# Altium PCB HandTiePCB_new3.PcbDoc
Units mil, origin at the board's own origin, x right, y up, seen from the top; angles counter-clockwise.
Board outline 6000 x 4000 mil, 2 copper layers (Top Layer, Bottom Layer); 49 components, 53 nets, 217 pads, 1 vias.
Unrouted connection lines stored in the file: 6.
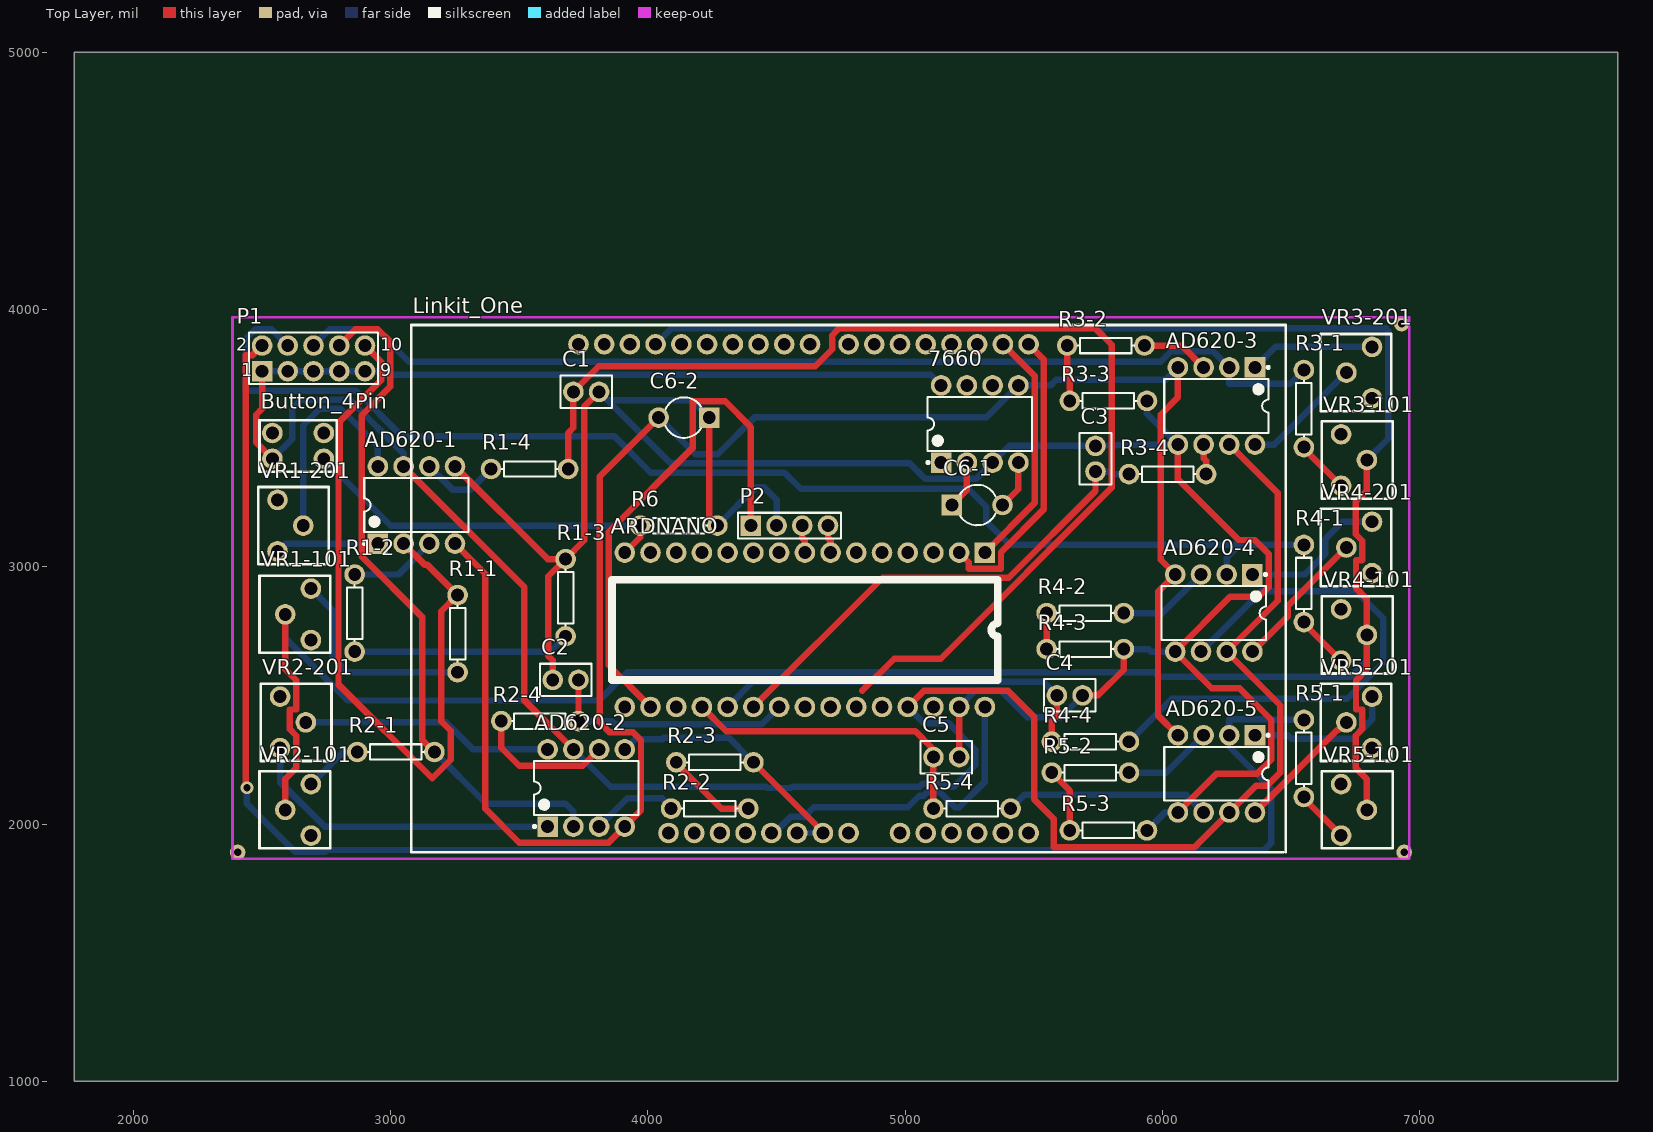
[diagram p0: Top Layer view]
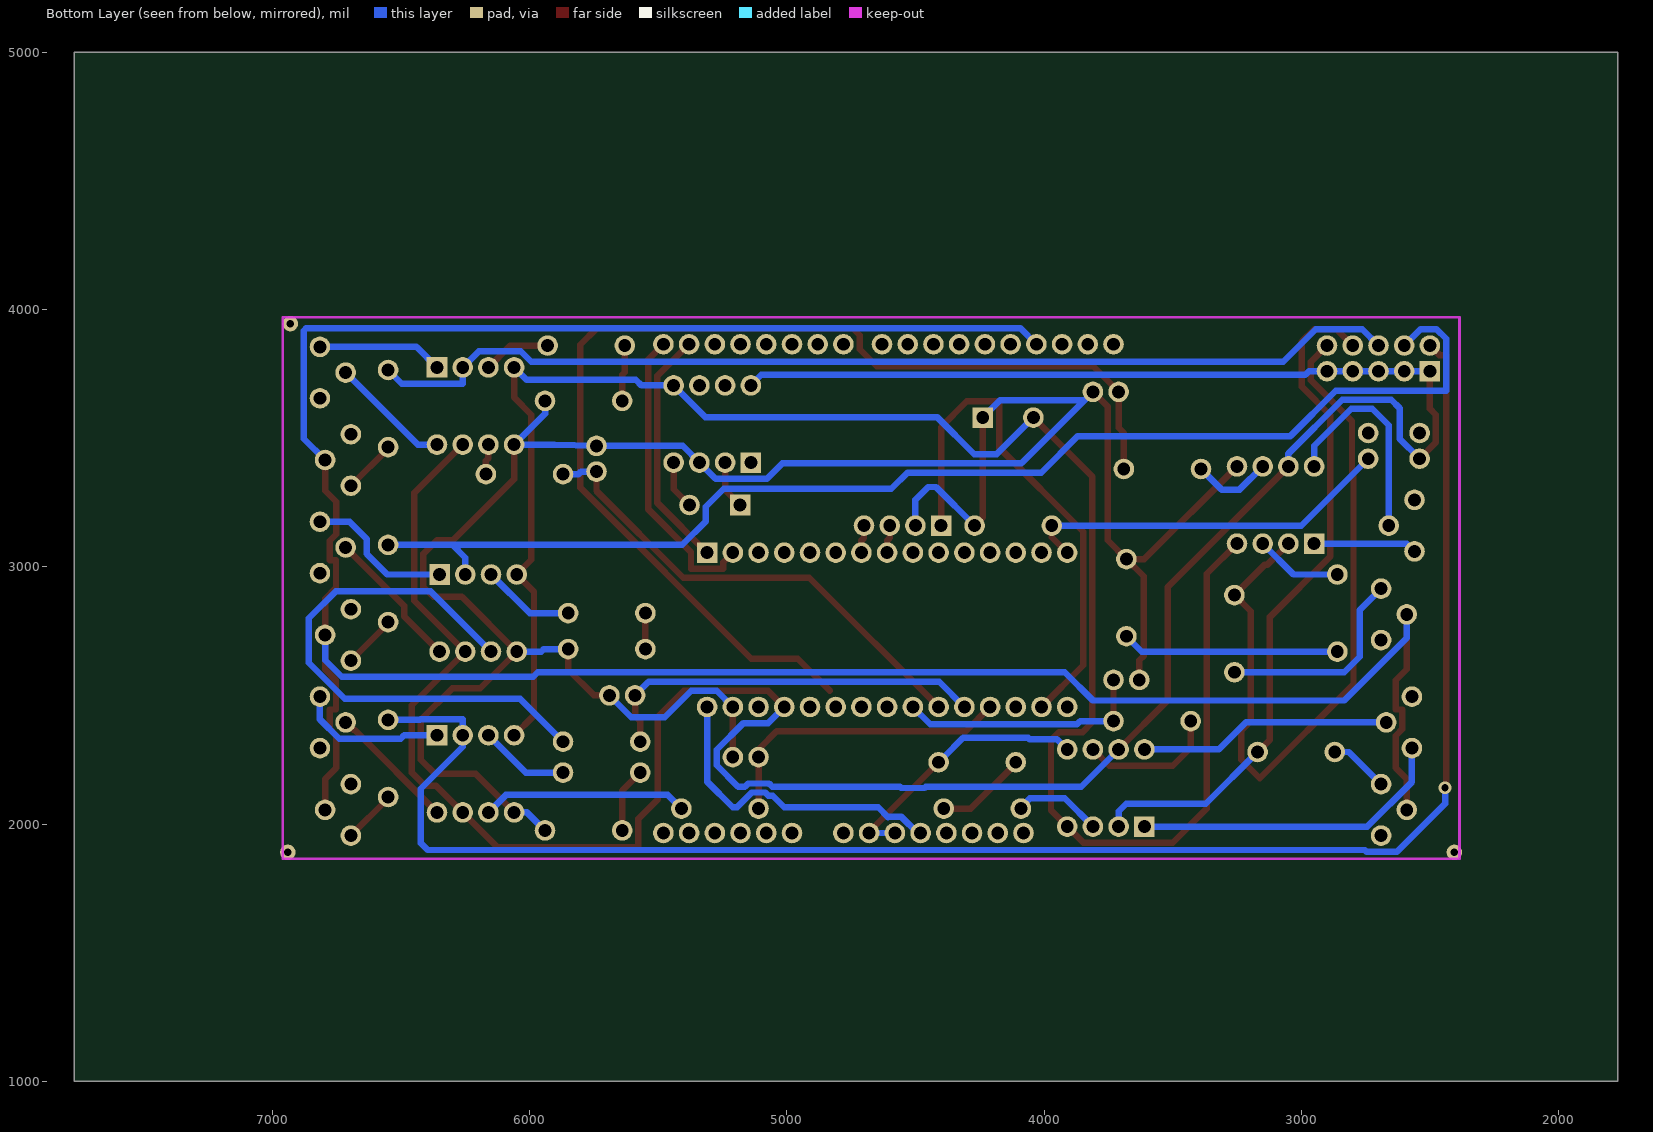
[diagram p1: Bottom Layer view, seen from below]

## Layer stack, top to bottom
Top Layer: signal copper 1.4
Dielectric: dielectric 12.6, FR-4, Dk 4.8
Bottom Layer: signal copper 1.4

## Board outline
1770,1000 7770,1000 7770,5000 1770,5000

## Design rules (kind name [scope] priority, off if disabled: settings)
Clearance [All] p1: gap=10
PolygonConnect [All] p1: connectstyle=Relief reliefconductorwidth=10 reliefentries=4 polygonreliefangle="90 Angle"
RoutingVias [All] p1: holewidth=28 width=50 viastyle="Through Hole" minholewidth=28 minwidth=50 maxholewidth=28 maxwidth=50
SilkscreenOverComponentPads [All] p1: minsilkscreentomaskgap=10
SolderMaskExpansion [All] p1: expansion=4
Width [All] p1: maxlimit=25 minlimit=25 preferedwidth=25
27 further rules are at their usual default settings.

## Components (designator, comment, footprint, x,y, rotation, side; value= is the part's Value field where it differs from the comment)
7660 "SW-DIP4" DIP-8 5290,3555 r90 top
AD620-1 "SW-DIP4" DIP-8 3100,3240 r90 top
AD620-2 "SW-DIP4" DIP-8 3760,2140 r90 top
AD620-3 "SW-DIP4" DIP-8 6210,3625 r270 top
AD620-4 "SW-DIP4" DIP-8 6200,2820 r270 top
AD620-5 "SW-DIP4" DIP-8 6210,2195 r270 top
ARDNANO "Arduino Nano" ARDNANO_DIP30 5310,3055 r270 top
Button_4Pin "Button_4Pin" Button_4Pin 2740,3420 r180 top
C1 "Cap" CAPR2.54-5.1x3.2 3760,3680 r0 top
C2 "Cap" CAPR2.54-5.1x3.2 3680,2560 r180 top
C3 "Cap" CAPR2.54-5.1x3.2 5740,3420 r90 top
C4 "Cap" CAPR2.54-5.1x3.2 5640,2500 r0 top
C5 "Cap" CAPR2.54-5.1x3.2 5160,2260 r0 top
C6-1 "Cap2" CAPR5-4X5 5280,3240 r0 top
C6-2 "Cap2" CAPR5-4X5 4140,3580 r180 top
Linkit_One "Linkit_One" Linkit_One 4080,1965 r90 top locked
P1 "Header 5X2" HDR2X5 2500,3760 r0 top
P2 "Header 4" HDR1X4 4400,3160 r0 top
R1-1 "Res1" AXIAL-0.3 3260,2740 r90 top
R1-2 "Res1" AXIAL-0.3 2860,2820 r90 top
R1-3 "Res1" AXIAL-0.3 3680,2880 r270 top
R1-4 "Res1" AXIAL-0.3 3540,3380 r180 top
R2-1 "Res1" AXIAL-0.3 3020,2280 r0 top
R2-2 "Res1" AXIAL-0.3 4240,2060 r180 top
R2-3 "Res1" AXIAL-0.3 4260,2240 r180 top
R2-4 "Res1" AXIAL-0.3 3580,2400 r180 top
R3-1 "Res1" AXIAL-0.3 6550,3615 r90 top
R3-2 "Res1" AXIAL-0.3 5780,3860 r0 top
R3-3 "Res1" AXIAL-0.3 5790,3645 r180 top
R3-4 "Res1" AXIAL-0.3 6020,3360 r0 top
R4-1 "Res1" AXIAL-0.3 6550,2935 r90 top
R4-2 "Res1" AXIAL-0.3 5700,2820 r0 top
R4-3 "Res1" AXIAL-0.3 5700,2680 r180 top
R4-4 "Res1" AXIAL-0.3 5720,2320 r0 top
R5-1 "Res1" AXIAL-0.3 6550,2255 r90 top
R5-2 "Res1" AXIAL-0.3 5720,2200 r0 top
R5-3 "Res1" AXIAL-0.3 5790,1975 r180 top
R5-4 "Res1" AXIAL-0.3 5260,2060 r0 top
R6 "Res1" AXIAL-0.3 4120,3160 r0 top
VR1-101 "VR" VarResistor 2690,2715 r90 top
VR1-201 "VR" VarResistor 2560,3260 r270 top
VR2-101 "VR" VarResistor 2690,1955 r90 top
VR2-201 "VR" VarResistor 2570,2495 r270 top
VR3-101 "VR" VarResistor 6695,3515 r270 top
VR3-201 "VR" VarResistor 6815,3655 r90 top
VR4-101 "VR" VarResistor 6695,2835 r270 top
VR4-201 "VR" VarResistor 6815,2975 r90 top
VR5-101 "VR" VarResistor 6695,2155 r270 top
VR5-201 "VR" VarResistor 6815,2295 r90 top

## Footprints (in the part's own frame and the unit in brackets; to place one, negate y for a bottom-side part, rotate by r counter-clockwise, add the part's x,y. Pads: shape width x height; smd on the part's side, far side on the other; paste and mask are expansions set on the pad)
ARDNANO_DIP30 [mil]
  rect 80x80 hole 50 mask+4: 1(0,0)
  round 80 hole 50 mask+4: 2(0,-100) 3(0,-200) 4(0,-300) 5(0,-400) 6(0,-500) 7(0,-600) 8(0,-700) 9(0,-800) 10(0,-900) 11(0,-1000) 12(0,-1100) 13(0,-1200) 14(0,-1300) 15(0,-1400) 16(600,-1400) 17(600,-1300) 18(600,-1200) 19(600,-1100) 20(600,-1000) 21(600,-900) 22(600,-800) 23(600,-700) 24(600,-600) 25(600,-500) 26(600,-400) 27(600,-300) 28(600,-200) 29(600,-100) 30(600,0)
  silkscreen extent 105,-1450 495,50
AXIAL-0.3 [mil] "Axial Device, Thru-Hole; 2 Leads; 0.3 in Pin Spacing"
  round 80 hole 50 mask+4: 1(-150,0) 2(150,0)
  silkscreen extent -109,-30 109,30
Button_4Pin [mil]
  round 80 hole 50 mask+4: 1(0,0) 2(0,-100) 3(200,-100) 4(200,0)
  silkscreen extent -50,-150 250,50
CAPR2.54-5.1x3.2 [mil] "Capacitor, Ceramic, Thru-Hole, Dipped Radial; Body 5.1 x 3.2 mm (WxT) Pin Spacing 2.54 mm (typ)"
  round 80 hole 50 mask+4: 1(-50,0) 2(50,0)
  silkscreen extent -100,-63 100,63
CAPR5-4X5 [mil] "Capacitor; 2 Leads"
  rect 80x80 hole 50 mask+4: 1(-98.43,0)
  round 80 hole 50 mask+4: 2(98.43,0)
  silkscreen extent -66,-79 72,79
DIP-8 [mil] "DIP; 8 Leads; Row Spacing 7.62 mm; Pitch 2.54 mm"
  rect 80x80 hole 50 mask+4: 1(-150,150)
  round 80 hole 50 mask+4: 2(-150,50) 3(-150,-50) 4(-150,-150) 5(150,-150) 6(150,-50) 7(150,50) 8(150,150)
  silkscreen extent -155,-203 104,206, body extent -142,-203 142,203, height 200
HDR1X4 [mil] "Connector; Header; 4 Position"
  rect 80x80 hole 50: 1(0,0)
  round 80 hole 50: 2(100,0) 3(200,0) 4(300,0)
  silkscreen extent -50,-50 350,50
HDR2X5 [mil] "Connector; Header; 5x2 Position"
  rect 80x80 hole 50: 1(0,0)
  round 80 hole 50: 2(0,100) 3(100,0) 4(100,100) 5(200,0) 6(200,100) 7(300,0) 8(300,100) 9(400,0) 10(400,100)
  silkscreen extent -50,-50 450,150
Linkit_One [mil]
  round 80 hole 50 mask+4: 1(0,0) 2(0,-100) 3(0,-200) 4(0,-300) 5(0,-400) 6(0,-500) 7(0,-600) 8(0,-700) 9(0,-900) 10(0,-1000) 11(0,-1100) 12(0,-1200) 13(0,-1300) 14(0,-1400) 15(1900,-1400) 16(1900,-1300) 17(1900,-1200) 18(1900,-1100) 19(1900,-1000) 20(1900,-900) 21(1900,-800) 22(1900,-700) 23(1900,-550) 24(1900,-450) 25(1900,-350) 26(1900,-250) 27(1900,-150) 28(1900,-50) 29(1900,50) 30(1900,150) 31(1900,250) 32(1900,350)
  silkscreen extent -75,-2400 1975,1000
VarResistor [mil]
  round 80 hole 50 mask+4: 1(0,0) 2(100,100) 3(200,0)
  silkscreen extent -50,-75 250,200

## Part data
7660 AD620-1 AD620-2 AD620-3 AD620-4 AD620-5: "DIP Switch"
C1 C2 C3 C4 C5 C6-1 C6-2: "Capacitor"
P1: "Header, 5-Pin, Dual row"
P2: "Header, 4-Pin"
R1-1 R1-2 R1-3 R1-4 R2-1 R2-2 R2-3 R2-4 R3-1 R3-2 R3-3 R3-4 R4-1 R4-2 R4-3 R4-4 R5-1 R5-2 R5-3 R5-4 R6: "Resistor"
VR1-101 VR1-201 VR2-101 VR2-201 VR3-101 VR3-201 VR4-101 VR4-201 VR5-101 VR5-201: library part VarR

## Free pads (board coordinates)
  round 60 hole 30: 0(2405,1890) 1(6940,1890) 2(6930,3945)

## Via types
v1: diameter 50, hole 28, Top Layer to Bottom Layer, 1 vias

## Nets (pads, with @x,y where several pads share a name; then routed paths per layer and width w, separated by ;. In a path a pad name is that pad's centre, name@x,y a point inside that pad or via, vN(x,y) a via of type N, cw(c..) or ccw(c..) an arc to the next point about the centre after c; other vN are vias at no path point)
GND: 7660.3 AD620-1.5 AD620-2.5 AD620-3.5 AD620-4.5 AD620-5.5 ARDNANO.29 C1.2 C2.2 C3.2 C4.2 C5.2 C6-2.1 Linkit_One.6 Linkit_One.7 P2.2 R1-3.1 R2-3.1 R3-3.1 R4-3.1 R5-3.1 R6.2 | length 10466.8
  Top Layer w25: AD620-1.5 3610,3030 R1-3.1 ; C2.2 3630,2636 3613,2653 3613,2963 R1-3.1 ; C1.2 3753,3623 3753,3103 R1-3.1 ; C6-2.1 4238.43,3191.57 R6.2 ; R2-3.1@4390,2260 4680,1970 Linkit_One.7 ; C5.2 ARDNANO.29 ; C4.2 5750,2500 5850,2600 R4-3.1 ; AD620-5.5 6210,2195 6368,2195 6423,2250 6423,2405 6300,2528 6192,2528 AD620-4.5 6263,2883 6375,2883 6413,2921 6413,3050 6359,3104 6297,3104 6060,3341 AD620-3.5
  Bottom Layer w25: C1.2 3843,3647 ; AD620-2.5 3950,2330 4056.61,2330 4061.61,2335 4315,2335 R2-3.1@4390,2260 ; C6-2.1 4171.43,3647 3843,3647 ; R6.2 4420,3310 4450,3310 4500,3260 P2.2 ; Linkit_One.6 Linkit_One.7 ; ARDNANO.29 5272.5,2517.5 5372,2517.5 5474.5,2415 5605,2415 C4.2 ; R4-3.1 5945,2680 5955,2670 AD620-4.5 ; R5-3.1 6010,2045 AD620-5.5 ; R3-3.1 5940,3595 AD620-3.5 5905,3475 C3.2 5405,3470 7660.3 5277,3342 5077,3342 5017,3402 4088,3402 3843,3647
GND2: Linkit_One.29 VR1-101.2 VR2-101.2 VR3-101.2 VR4-101.2 VR5-101.2 | length 10324.1
  Top Layer w25: VR2-101.2 2590,2175 2633,2218 2633,2343.61 2607.5,2369.11 2607.5,2445 2632.5,2445 2632.5,2558.5 2590,2601 VR1-101.2 ; VR5-101.2 6795,2175 6752,2218 6752,2343.61 6777.5,2369.11 6777.5,2445 6752.5,2445 6752.5,2558 6795,2600.5 VR4-101.2 6795,2875 6752.5,2917.5 6752.5,3025 6777.5,3025 6777.5,3100.89 6752,3126.39 6752,3253 6795,3296 VR3-101.2
  Bottom Layer w25: VR1-101.2 2590,2723 2833,2480 3810,2480 3920,2590 5968,2590 5986,2572 6730,2572 6795,2637 VR4-101.2 ; Linkit_One.29 4093,3928 6868,3928 6878,3918 6878,3498 VR3-101.2
Net7660_2: 7660.2 C6-1.1 | length 189.2
  Top Layer w25: C6-1.1 5240,3298.43 7660.2
Net7660_4: 7660.4 C6-1.2 | length 190.5
  Top Layer w25: C6-1.2 5440,3301.57 7660.4
Net7660_5: 7660.5 AD620-1.4 AD620-2.4 AD620-3.4 AD620-4.4 AD620-5.4 C6-2.2 | length 7291.8
  Top Layer w25: AD620-1.4 3367,2973 3367,2060 3500,1927 3847,1927 AD620-2.4 3973,2053 3973,2325 3940.5,2357.5 3850,2357.5 3812.5,2395 3812.5,3350.93 C6-2.2 ; AD620-5.4 5983,2422 5983,2903 AD620-4.4 5993,3027 5993,3591 6060,3658 AD620-3.4
  Bottom Layer w25: C6-2.2 4184.57,3437 4271,3437 4416,3582 5317,3582 7660.5 5565,3705 5587,3727 6012,3727 AD620-3.4
NetAD620-1_1: AD620-1.1 VR1-201.3 | length 402.4
  Bottom Layer w25: VR1-201.3 2590,3090 AD620-1.1
NetAD620-1_2: AD620-1.2 P1.10 R1-1.2 | length 3002.9
  Top Layer w25: P1.10 2962.5,3797.5 2962.5,3725 2803,3565.5 2803,3358 2797,3352 2797,2542 3161,2178 3233,2250 3233,2363 3197,2399 3197,2827 R1-1.2 3143,3007 3133,3007 AD620-1.2
NetAD620-1_3: AD620-1.3 R1-2.2 | length 339.7
  Bottom Layer w25: R1-2.2 3030,2970 AD620-1.3
NetAD620-1_6: AD620-1.6 R1-4.2 | length 310.4
  Bottom Layer w25: AD620-1.6 3240,3300 3310,3300 R1-4.2
NetAD620-1_8: AD620-1.8 VR1-201.2 | length 845.9
  Bottom Layer w25: VR1-201.2 2660,3550 2723.72,3613.72 2806.28,3613.72 2950,3470 AD620-1.8
NetAD620-2_1: AD620-2.1 VR2-201.3 | length 1243.4
  Bottom Layer w25: VR2-201.3 2570,2163.39 2743.39,1990 AD620-2.1
NetAD620-2_2: AD620-2.2 P1.8 R2-1.2 | length 2697
  Top Layer w25: P1.8 2863,3923 2950,3923 2997.5,3875.5 2997.5,3700 2887,3589.5 2887,3040 3122,2805 3122,2328 R2-1.2
  Bottom Layer w25: R2-1.2 3371,2079 3681,2079 3710,2050 AD620-2.2
NetAD620-2_3: AD620-2.3 R2-2.2 | length 350.9
  Bottom Layer w25: AD620-2.3 3920,2100 4055,2100 4080,2075 R2-2.2@4080,2050
NetAD620-2_6: AD620-2.6 R2-4.2 | length 538.1
  Top Layer w25: R2-4.2 3430,2297 3500,2227 3747,2227 AD620-2.6
NetAD620-2_8: AD620-2.8 VR2-201.2 | length 983.5
  Bottom Layer w25: VR2-201.2 3215,2395 3320,2290 AD620-2.8
NetAD620-3_1: AD620-3.1 VR3-201.3 | length 488.1
  Bottom Layer w25: AD620-3.1 6440,3855 VR3-201.3
NetAD620-3_2: AD620-3.2 P1.6 R3-1.2 | length 4056.3
  Bottom Layer w25: P1.6 2763,3923 2944,3923 3070,3797 5993,3797 6034,3838 6197,3838 AD620-3.2 6260,3712 6497,3712 R3-1.2
NetAD620-3_3: AD620-3.3 R3-2.2 | length 265.2
  Top Layer w25: R3-2.2 6075,3860 AD620-3.3
NetAD620-3_6: AD620-3.6 R3-4.2 | length 119.1
  Top Layer w25: AD620-3.6 6160,3422 6170,3412 R3-4.2
NetAD620-3_8: AD620-3.8 VR3-201.2 | length 471
  Bottom Layer w25: AD620-3.8 6435,3475 VR3-201.2
NetAD620-4_1: AD620-4.1 VR4-201.3 | length 583.9
  Bottom Layer w25: AD620-4.1 6553,2970 6633,3050 6633,3108 6700,3175 VR4-201.3
NetAD620-4_2: AD620-4.2 P1.4 R4-1.2 | length 5187.1
  Bottom Layer w25: P1.4 2536,3924 2475,3924 2437,3886 2437,3684.64 2865.69,3684.64 3042.33,3508 3868.94,3508 4010.94,3366 4531,3366 4594,3303 5245,3303 5315,3233 5315,3176 5406,3085 6300,3085 ; AD620-4.2 6250,3035 6300,3085 ; 6300,3085 R4-1.2 6300,3085
NetAD620-4_3: AD620-4.3 R4-2.2 | length 362.1
  Bottom Layer w25: R4-2.2 6000,2820 AD620-4.3
NetAD620-4_6: AD620-4.6 R4-4.2 | length 2137.4
  Bottom Layer w25: R4-4.2 6037,2487 6718.61,2487 6858,2626.39 6858,2800 6753,2905 6385,2905 AD620-4.6
NetAD620-4_8: AD620-4.8 VR4-201.2 | length 556.2
  Top Layer w25: AD620-4.8 6488,2808 6488,2848 VR4-201.2
NetAD620-5_1: AD620-5.1 VR5-201.3 | length 579.7
  Bottom Layer w25: AD620-5.1 6488,2345 6501,2332 6740.39,2332 6815,2406.61 VR5-201.3
NetAD620-5_2: AD620-5.2 P1.2 R5-1.2 | length 6737.6
  Top Layer w25: v1(2441,2141) 2437,2145 2437,3823 2463,3823 P1.2
  Bottom Layer w25: v1(2441,2141) 2441,2079.5 2628,1892.5 2746.5,1892.5 2753,1899 6396,1899 6423,1926 6423,2137 6260,2300 AD620-5.2 6260,2408 6423,2408 6426,2405 R5-1.2
NetAD620-5_3: AD620-5.3 R5-2.2 | length 350.1
  Bottom Layer w25: R5-2.2 6015,2200 AD620-5.3
NetAD620-5_6: AD620-5.6 R5-4.2 | length 800.1
  Bottom Layer w25: R5-4.2 5463,2113 6092,2113 AD620-5.6
NetAD620-5_8: AD620-5.8 VR5-201.2 | length 500
  Top Layer w25: AD620-5.8 6681,2366 6686,2366 VR5-201.2
NetARDNANO_1: ARDNANO.1 Linkit_One.16 | length 940.9
  Top Layer w25: ARDNANO.1 5503,3248 5503,3742 Linkit_One.16
NetARDNANO_2: ARDNANO.2 Linkit_One.15 | length 1168.4
  Top Layer w25: ARDNANO.2 5247,3018 5247,2992.5 5372.5,2992.5 5372.5,3057 5538,3222.5 5538,3807 Linkit_One.15
NetARDNANO_15: ARDNANO.15 Button_4Pin.1 R6.1 | length 1467.5
  Top Layer w25: ARDNANO.15 3970,3115 R6.1
  Bottom Layer w25: Button_4Pin.1 3000,3160 R6.1
NetARDNANO_17: ARDNANO.17 P2.1 | length 2040.4
  Top Layer w25: ARDNANO.17 3847.5,2617.5 3847.5,3136 4175,3463.5 4175,3643 4300,3643 4400,3543 P2.1
NetARDNANO_19: ARDNANO.19 C5.1 R5-4.1 | length 1208.3
  Top Layer w25: ARDNANO.19 4305,2360 4415,2360 4703.75,2360 5040,2360 5105,2295 5105,2255 C5.1 R5-4.1
NetARDNANO_20: ARDNANO.20 C4.1 R4-4.1 | length 1530.4
  Top Layer w25: R4-4.1 5570,2400 5590,2420 C4.1
  Bottom Layer w25: ARDNANO.20 4407.5,2552.5 5537.5,2552.5 C4.1
NetARDNANO_21: ARDNANO.21 C3.1 R3-4.1 | length 1887.1
  Top Layer w25: ARDNANO.21 4912.5,2957.5 5402.61,2957.5 5740,3294.89 C3.1
  Bottom Layer w25: C3.1 5800,3370 5810,3360 R3-4.1
NetARDNANO_22: ARDNANO.22 C2.1 R2-4.1 | length 972.7
  Top Layer w25: R2-4.1 C2.1
  Bottom Layer w25: R2-4.1 3860,2400 3872,2388 4443,2388 ARDNANO.22
NetARDNANO_23: ARDNANO.23 P2.4 | length 4427.7
  Top Layer w25: 3690,3380 3690,3520 3710,3540 3710,3680 3809,3779 4650,3779 4716,3845 4716,3900 4744,3928 5738,3928 5803,3863 5803,3308 5138,2643 4958,2643 4832.5,2517.5 ; ARDNANO.23 ARDNANO.23@4621.61,2455
NetARDNANO_24: ARDNANO.24 P2.3
NetARDNANO_25: ARDNANO.25 C1.1 R1-4.1
NetARDNANO_30: ARDNANO.30 Linkit_One.5 | length 1251.1
  Bottom Layer w25: Linkit_One.5 4491.61,1965 4554.11,2027.5 4605.89,2027.5 4606.69,2026.69 4645,2065 5010,2065 5055,2110 5071.61,2110 5084.11,2122.5 5135.89,2122.5 5193.39,2065 5210,2065 5310,2165 ARDNANO.30
NetR1-1_1: R1-1.1 VR1-101.3 | length 811.2
  Bottom Layer w25: VR1-101.3 2773,2832 2773,2650 2833,2590 R1-1.1
NetR1-2_1: R1-2.1 R1-3.2 | length 844.9
  Bottom Layer w25: R1-2.1 3620,2670 R1-3.2
NetR2-1_1: R2-1.1 VR2-101.3 | length 231.8
  Bottom Layer w25: VR2-101.3 2815,2280 R2-1.1
NetR2-2_1: R2-2.1 R2-3.2 | length 380.8
  Top Layer w25: R2-3.2@4090,2255 4285,2060 R2-2.1
NetR3-1_1: R3-1.1 VR3-101.3 | length 210.1
  Top Layer w25: R3-1.1 6550,3460 VR3-101.3
NetR3-2_1: R3-2.1 R3-3.2 | length 219.1
  Top Layer w25: R3-2.1 5630,3757 5640,3747 R3-3.2
NetR4-1_1: R4-1.1 VR4-101.3 | length 210.1
  Top Layer w25: R4-1.1 6550,2780 VR4-101.3
NetR4-2_1: R4-2.1 R4-3.2 | length 140
  Top Layer w25: R4-3.2 R4-2.1
NetR5-1_1: R5-1.1 VR5-101.3 | length 210.1
  Top Layer w25: R5-1.1 6550,2100 VR5-101.3
NetR5-2_1: R5-2.1 R5-3.2 | length 254
  Top Layer w25: R5-2.1 5640,2130 R5-3.2
VCC: 7660.8 AD620-1.7 AD620-2.7 AD620-3.7 AD620-4.7 AD620-5.7 ARDNANO.27 Button_4Pin.4 P1.1 P1.3 P1.5 P1.7 P1.9 | length 10907.3
  Top Layer w25: P1.1 2500,3614 2477,3591 2477,3483 Button_4Pin.4 ; AD620-1.7 3520,2920 3520,2480 AD620-2.7 ; ARDNANO.27 5073,2518 5400,2518 5501,2417 5501,2096 5577,2020 5577,1909 6124,1909 AD620-5.7 6364,2149 6407,2149 6458,2200 6458,2462 AD620-4.7 6448,2868 6448,3287 AD620-3.7
  Bottom Layer w25: P1.1 P1.3 P1.5 P1.7 P1.9 2970,3760 2984,3746 5099,3746 7660.8 ; Button_4Pin.4 2618,3498 2618,3617 2650,3649 2841,3649 3050,3440 AD620-1.7 ; AD620-2.7 3855,2145 4460,2145 4465,2140 4555,2140 4560,2145 5057.11,2145 5069.61,2157.5 5150.39,2157.5 5162.89,2145 5189.5,2145 5272.5,2228 5272.5,2288.5 5168.5,2392.5 5072.5,2392.5 ARDNANO.27
pads on no net: 7660.1 7660.6 7660.7 ARDNANO.3 ARDNANO.4 ARDNANO.5 ARDNANO.6 ARDNANO.7 ARDNANO.8 ARDNANO.9 ARDNANO.10 ARDNANO.11 ARDNANO.12 ARDNANO.13 ARDNANO.14 ARDNANO.16 ARDNANO.18 ARDNANO.26 ARDNANO.28 Button_4Pin.2 Button_4Pin.3 Linkit_One.1 Linkit_One.2 Linkit_One.3 Linkit_One.4 Linkit_One.8 Linkit_One.9 Linkit_One.10 Linkit_One.11 Linkit_One.12 Linkit_One.13 Linkit_One.14 Linkit_One.17 Linkit_One.18 Linkit_One.19 Linkit_One.20 Linkit_One.21 Linkit_One.22 Linkit_One.23 Linkit_One.24 Linkit_One.25 Linkit_One.26 Linkit_One.27 Linkit_One.28 Linkit_One.30 Linkit_One.31 Linkit_One.32 VR1-101.1 VR1-201.1 VR2-101.1 VR2-201.1 VR3-101.1 VR3-201.1 VR4-101.1 VR4-201.1 VR5-101.1 VR5-201.1
copper on no net: | length 218.3
  Top Layer w25: 4600,3160 4600,3112 4610,3102 4610,3055 ; 4700,3160 4700,3112 4710,3102 4710,3055

## Keep-outs
Keep-Out Layer:
  lines w10: 2385,1865 6960,1865 6960,3970 2385,3970 2385,1865

## Text inside footprints (layer, text, board x,y; h text height)
P1: Top Overlay "2" at 2400,3840 h50; Top Overlay "1" at 2420,3740 h50; Top Overlay "9" at 2960,3740 h50; Top Overlay "10" at 2960,3840 h50